# EAGLE board Remote (EAGLE 9.5.0)
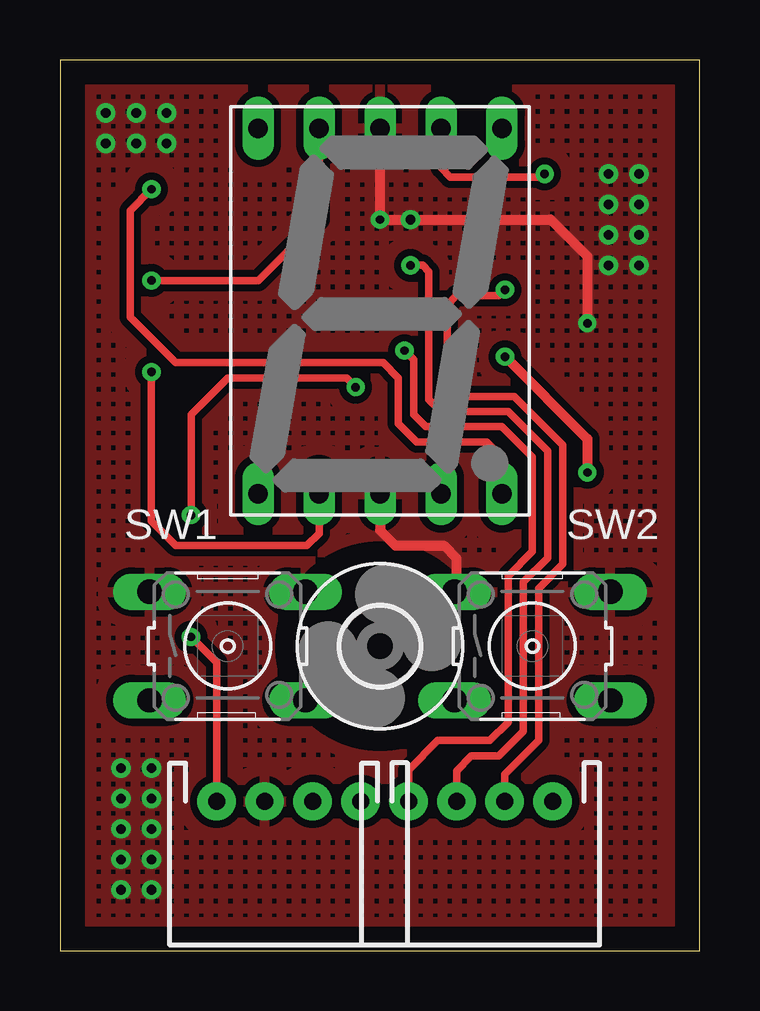
[diagram p0: board, top side]
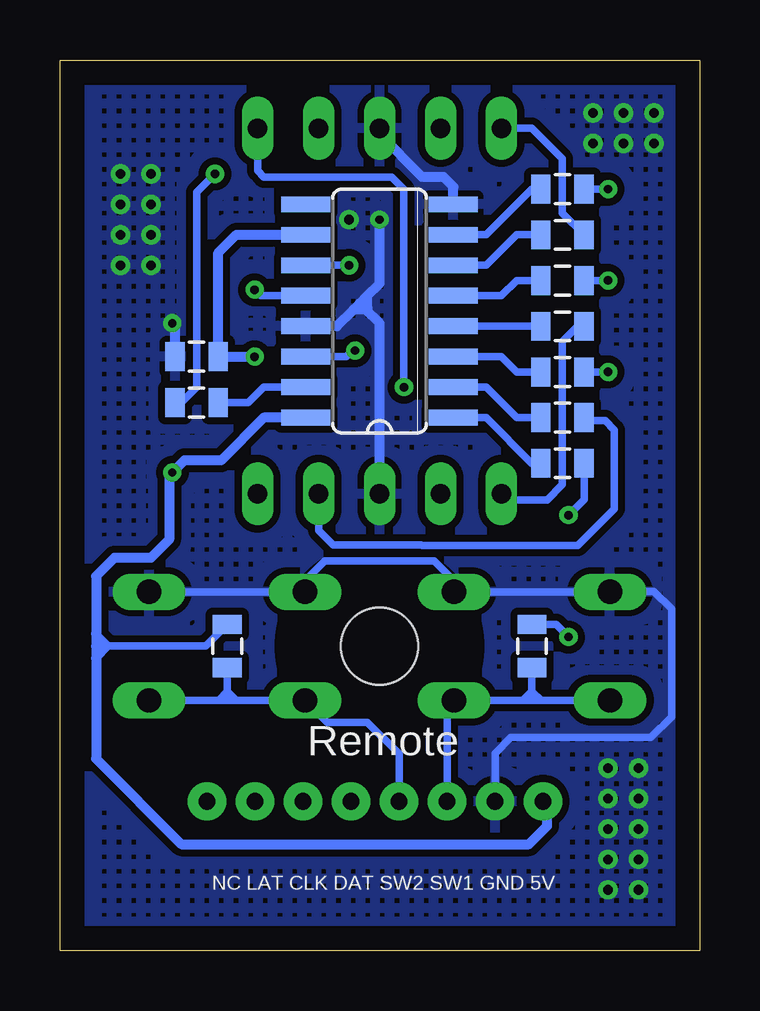
[diagram p1: board, bottom side, seen from below]

Size 26.65 x 37.13 mm. Coordinates in mm from the lower left corner, seen from the top.
Outline: 0,0 26.65,0 26.65,37.13 0,37.13 0,0
Copper layers (1*16): Top 0.035mm / dielectric 1.5mm / Bottom 0.035mm
Design rules "default *": minimum track width 6mil, minimum drill 0.35mm, track to track 6mil, track to pad 6mil, pad to pad 6mil, via to via 6mil, smd to smd 6mil, copper to edge 40mil, drill to drill 6mil, minimum pad ring 10mil, minimum via ring 8mil, stop-mask expansion 4mil, vias tented up to drill 25mil, thermal gap 10mil

## Footprints (pad centres in the part's own frame; a part is rotated, then mirrored left to right if it is on the bottom)
0805 = smd 0.8 x 1.2: 1 -0.9,0; 2 0.9,0
HDSP-M = drill 0.813 long: 1 -5.08,-7.62; 2 -2.54,-7.62; 3 0,-7.62; 4 2.54,-7.62; 5 5.08,-7.62; 6 5.08,7.62; 7 2.54,7.62; 8 0,7.62; 9 -2.54,7.62; 10 -5.08,7.62
SO16 = smd 0.66 x 2.032: 1 -4.445,-3.073; 2 -3.175,-3.073; 3 -1.905,-3.073; 4 -0.635,-3.073; 5 0.635,-3.073; 6 1.905,-3.073; 7 3.175,-3.073; 8 4.445,-3.073; 9 4.445,3.073; 10 3.175,3.073; 11 1.905,3.073; 12 0.635,3.073; 13 -0.635,3.073; 14 -1.905,3.073; 15 -3.175,3.073; 16 -4.445,3.073
JST-4-PTH = drill 0.7 pad 1.6: 1 -3,0; 2 -1,0; 3 1,0; 4 3,0
B3F-10XX = drill 1.016 long: 1 -3.251,2.261; 2 3.251,2.261; 3 -3.251,-2.261; 4 3.251,-2.261
3,2 = hole 3.2: 0,0

## Placement (x,y rotation side)
C1  0.1  [0805]  20.96,24.77 180 bottom
DIS1  HD-H101  [HDSP-M]  13.34,26.67 0 top
IC1  74HC595D  [SO16]  13.34,26.67 90 bottom
J5  [JST-4-PTH]  9.53,6.23 180 top
J6  Remote  [JST-4-PTH]  17.53,6.23 180 top
R1  330  [0805]  20.96,22.86 180 bottom
R2  330  [0805]  5.71,20.32 0 bottom
R3  330  [0805]  5.71,22.23 0 bottom
R4  330  [0805]  5.71,24.13 0 bottom
R5  330  [0805]  5.71,26.04 0 bottom
R6  330  [0805]  5.71,27.94 0 bottom
R7  330  [0805]  5.71,29.84 0 bottom
R8  330  [0805]  5.71,31.75 0 bottom
R9  10k  [0805]  6.98,12.7 90 bottom
R10  10k  [0805]  19.68,12.7 90 bottom
S1  SW1  [B3F-10XX]  6.98,12.7 0 top
S2  SW2  [B3F-10XX]  19.68,12.7 0 top
U$1  [3,2]  13.34,12.7 0 top

## Library data of the parts
C1 = SparkFun
DIS1 = display-hp; OC_FARNELL: unknown; OC_NEWARK: unknown
IC1 = 74xx-eu
J5 J6 = SparkFun-Connectors; PROD_ID: WIRE-13531; SF_ID: PRT-09916
R1-R10 = SparkFun-Resistors
S1 S2 = switch-omron; MPN: B3F-1000; OC_FARNELL: 176432; OC_NEWARK: 36M3542
U$1 = holes

## Nets
A2: J5.2 R9.1 S1.3 S1.4
A3: J5.1 R10.1 S2.3 S2.4
D2: IC1.14 J6.4
D3: IC1.11 J6.3
D4: IC1.12 J6.2
GND: C1.2 DIS1.3 DIS1.8 IC1.8 IC1.13 J5.3 S1.1 S1.2 S2.1 S2.2
N$1: IC1.15 R1.1
N$2: IC1.1 R2.1
N$3: DIS1.5 R8.2
N$4: IC1.2 R3.1
N$5: IC1.3 R4.1
N$6: IC1.4 R5.1
N$7: IC1.5 R6.1
N$8: IC1.6 R7.1
N$9: IC1.7 R8.1
N$12: DIS1.7 R1.2
N$13: DIS1.6 R2.2
N$14: DIS1.4 R3.2
N$15: DIS1.2 R4.2
N$16: DIS1.1 R5.2
N$17: DIS1.9 R6.2
N$18: DIS1.10 R7.2
VCC: C1.1 IC1.10 IC1.16 J5.4 R9.2 R10.2

## Tracks (layer width: path | path; a pad name or v marks a point on that pad's centre or on a via)
A2
  Bottom 0.305: 7.37,10.44 S1.4 10.53,10.15 J5.2 | 7.37,10.44 6.98,10.44 | S1.3 6.6,10.44 | 6.6,10.44 6.98,10.44 | 6.98,10.82 6.98,10.44 | R9.1 6.98,10.82 | 6.6,10.44 6.98,10.82 | 6.98,10.82 7.37,10.44
A3
  Bottom 0.305: J5.1 12.53,8.21 13.84,9.53 15.52,9.53 S2.3 19.3,10.44 | 19.3,10.44 19.68,10.44 | 19.68,10.44 20.04,10.44 | 20.04,10.44 S2.4 | 19.68,10.82 19.68,10.44 | R10.1 19.68,10.82 | 19.68,10.82 19.67,10.81 | 19.67,10.81 19.3,10.44 | 19.67,10.81 20.04,10.44
D2  (via drill 0.35)
  Top 0.305: J6.4 14.53,7.54 15.75,8.76 17.91,8.76 18.67,9.53 18.67,15.62 19.68,16.64 19.68,20.57 18.41,21.84 15.24,21.84 14.73,22.35 14.73,24.64 v14.35,25.02
  Bottom 0.305: v14.35,25.02 14.48,25.02 14.73,24.77 IC1.14
D3  (via drill 0.35)
  Top 0.305: J6.3 16.53,7.51 17.14,8.13 18.29,8.13 19.3,9.14 19.3,15.37 20.32,16.38 20.32,20.83 18.67,22.48 15.88,22.48 15.37,22.99 15.37,28.32 15.11,28.57 v14.61,28.57
  Bottom 0.305: v14.61,28.57 IC1.11
D4  (via drill 0.35)
  Top 0.305: J6.2 18.53,7.35 19.94,8.76 19.94,8.89 19.94,15.11 20.96,16.13 20.96,21.08 18.92,23.11 16.38,23.11 16.13,23.37 16.13,26.92 16.51,27.3 18.29,27.3 v18.54,27.56
  Bottom 0.305: v18.54,27.56 18.29,27.3 IC1.12
GND  (via drill 0.35, 0.4)
  Top 0.406: DIS1.8 v13.34,30.48 20.45,30.48 21.97,28.96 v21.97,26.16 | DIS1.3 13.34,17.53 13.97,16.89 16,16.89 16.51,16.38 16.51,15.04 S2.1
  Bottom 0.305: S2.2 S2.1 16.43,15.44 15.62,16.26 11.05,16.26 10.24,15.44 S1.2 3.94,14.96 | 3.94,14.96 S1.1 | J5.3 8.53,8.24 7.87,8.89 2.03,8.89 1.17,9.75 1.17,14.25 1.91,14.99 3.91,14.99 3.94,14.96
  Bottom 0.406: C1.2 21.86,26.05 v21.97,26.16 | IC1.8 10.26,31.85 10.67,32.26 11.56,32.26 13.34,34.04 DIS1.8 | IC1.13 15.11,26.04 14.41,26.73 | 14.41,26.73 14.16,26.99 | 14.16,26.99 13.84,27.3 | 13.84,27.3 13.34,27.81 v13.34,30.48 | DIS1.3 13.34,26.16 13.91,26.73 | 13.91,26.73 14.16,26.99 | 13.91,26.73 13.84,26.8 13.84,27.3 | 13.91,26.73 14.41,26.73
  other vias: 22.86,32.38 14.61,30.48 24.13,32.38 24.13,31.11 22.86,31.11 22.86,29.84 22.86,28.57 24.13,28.57 24.13,29.84 1.91,34.92 3.18,34.92 4.45,34.92 4.45,33.65 3.18,33.65 1.91,33.65 2.54,7.62 2.54,6.35 2.54,5.08 2.54,3.81 2.54,2.54 3.81,2.54 3.81,3.81 3.81,5.08 3.81,6.35 3.81,7.62
  pour Top (isolate 0.3, hatched): 0,36.83 26.67,36.83 26.67,0 0,0
  pour Bottom (isolate 0.3, hatched): 0,36.83 26.67,36.83 26.67,0 0,0
N$1
  Bottom 0.305: IC1.15 18.16,23.5 18.8,22.86 R1.1
N$2
  Bottom 0.305: R2.1 6.98,20.32 8.89,22.23 IC1.1
N$3  (via drill 0.35)
  Top 0.305: v3.81,31.75 2.92,30.86 2.92,26.42 4.83,24.51 13.46,24.51 14.1,23.88 14.1,21.97 14.86,21.21 17.78,21.21 18.41,20.57 DIS1.5
  Bottom 0.305: R8.2 v3.81,31.75
N$4
  Bottom 0.305: R3.1 7.62,22.23 8.89,23.5 IC1.2
N$5
  Bottom 0.305: R4.1 7.62,24.13 8.25,24.77 IC1.3
N$6
  Bottom 0.305: R5.1 IC1.4
N$7
  Bottom 0.305: R6.1 7.62,27.94 8.25,27.3 IC1.5
N$8
  Bottom 0.305: R7.1 7.62,29.84 8.89,28.57 IC1.6
N$9
  Bottom 0.305: R8.1 6.98,31.75 8.89,29.84 IC1.7
N$12  (via drill 0.35)
  Top 0.305: v20.19,32.38 20.07,32.26 16.26,32.26 15.88,32.64 DIS1.7
  Bottom 0.305: R1.2 21.59,22.86 20.96,23.5 20.96,31.62 v20.19,32.38
N$13  (via drill 0.35)
  Top 0.305: v5.46,18.16 5.46,22.35 6.98,23.88 11.94,23.88 v12.32,23.5
  Bottom 0.305: R2.2 4.82,18.81 v5.46,18.16 | v12.32,23.5 12.32,31.75 12.83,32.26 18.16,32.26 18.41,32.51 DIS1.6
N$14
  Bottom 0.305: R3.2 4.69,22.1 3.94,22.1 3.56,21.72 3.56,18.41 5.08,16.89 11.56,16.89 11.59,16.92 15.27,16.92 15.88,17.53 DIS1.4
N$15  (via drill 0.35)
  Top 0.305: v3.81,24.13 3.81,17.91 4.83,16.89 10.29,16.89 10.8,17.4 DIS1.2
  Bottom 0.305: R4.2 v3.81,24.13
N$16
  Bottom 0.305: R5.2 5.08,26.04 5.71,25.4 5.71,19.43 6.35,18.8 8,18.8 DIS1.1
N$17  (via drill 0.35)
  Top 0.305: v3.81,27.94 8.25,27.94 10.8,30.48 DIS1.9
  Bottom 0.305: R6.2 v3.81,27.94
N$18
  Bottom 0.305: R7.2 5.71,30.75 5.71,33.02 6.98,34.29 DIS1.10
VCC  (via drill 0.35)
  Top 0.305: J5.4 6.53,12.02 v5.46,13.08
  Top 0.406: v18.54,24.77 21.97,21.34 v21.97,19.94
  Bottom 0.305: v5.46,13.08 5.98,13.6 R9.2 | R10.2 20.58,12.7 24.64,12.7 | 24.64,12.7 25.15,12.7 | 25.15,13.21 24.64,12.7 | 24.64,12.7 25.15,12.19
  Bottom 0.406: IC1.10 19.3,29.84 20.06,29.09 C1.1 v18.54,24.77 | IC1.16 18.16,22.23 19.94,20.45 21.46,20.45 v21.97,19.94 22.1,19.81 22.1,17.14 22.86,16.38 24.38,16.38 25.15,15.62 25.15,13.21 25.15,12.7 25.15,12.19 25.15,8 21.59,4.45 7.11,4.45 6.35,5.21 6.35,6.05 J5.4

## Text on the board
bNames: NC LAT CLK DAT SW2 SW1 GND 5V